# EAGLE board Ampli-2020 (EAGLE 7.2.0)
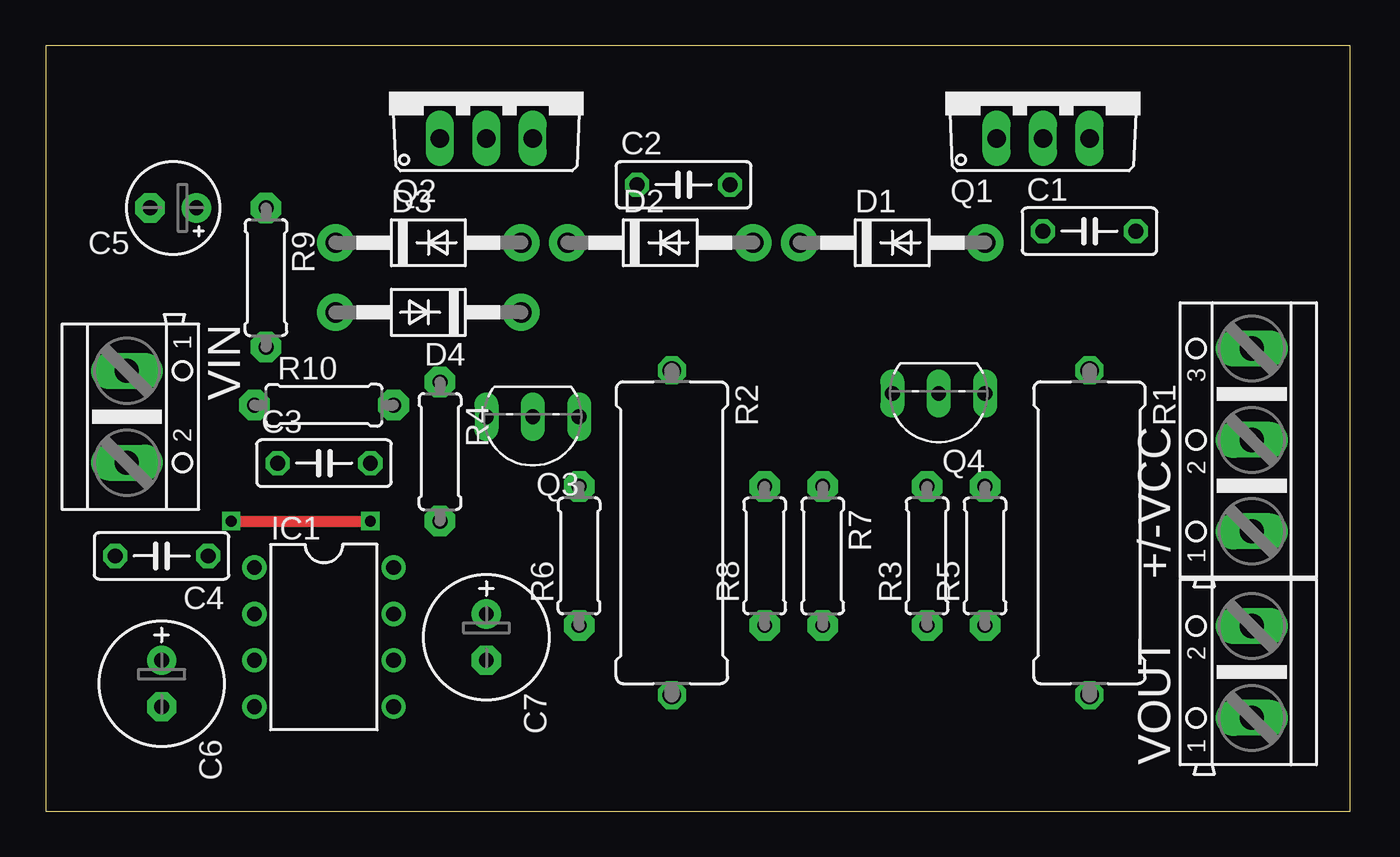
[diagram p0: board, top side]
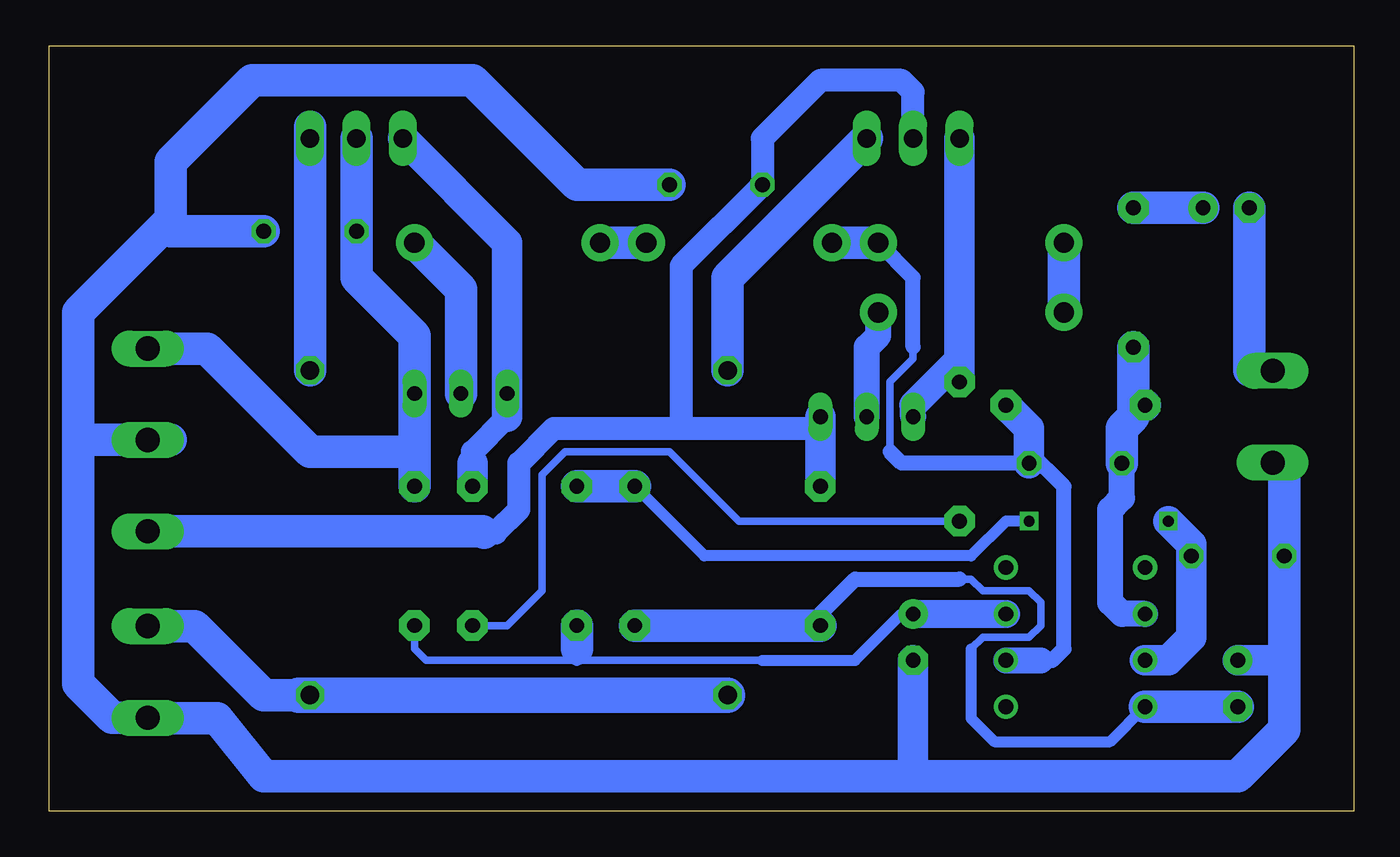
[diagram p1: board, bottom side, seen from below]

Size 71.42 x 41.9 mm. Coordinates in mm from the lower left corner, seen from the top.
Outline: 0,0 71.42,0 71.42,41.9 0,41.9 0,0
Copper layers (1*16): Top 0.035mm / dielectric 1.5mm / Bottom 0.035mm
Design rules "default": minimum track width 10mil, minimum drill 24mil, track to track 8mil, track to pad 8mil, pad to pad 8mil, via to via 8mil, smd to smd 8mil, copper to edge 40mil, drill to drill 8mil, minimum pad ring 10mil, minimum via ring 8mil, stop-mask expansion 4mil, vias tented up to drill 0mil, thermal gap 10mil

## Footprints (pad centres in the part's own frame; a part is rotated, then mirrored left to right if it is on the bottom)
AK500/3 = drill 1.321 long: 1 -5.004,0; 2 0,0; 3 5.004,0
C050-025X075 = drill 0.813 octagon: 1 -2.54,0; 2 2.54,0
E2,5-5 = drill 0.813 pad 1.6: + -1.27,0 | drill 0.813 pad 1.6 octagon: - 1.27,0
E2,5-7 = drill 0.813 pad 1.6: + -1.27,0 | drill 0.813 pad 1.6 octagon: - 1.27,0
DO41-10 = drill 1.118 pad 2.032: A 5.08,0; C -5.08,0
DIL08 = drill 0.813 pad 1.27: 1 -3.81,-3.81; 2 -1.27,-3.81; 3 1.27,-3.81; 4 3.81,-3.81; 5 3.81,3.81; 6 1.27,3.81; 7 -1.27,3.81; 8 -3.81,3.81
TO220AV = drill 1.016 long: B -2.54,-2.54; C 0,-2.54; E 2.54,-2.54
TO92-EBC = drill 0.813 long: B 0,-1.27; C -2.54,-1.27; E 2.54,-1.27
0617/17 = drill 1.016 octagon: 1 -8.89,0; 2 8.89,0
0207/7 = drill 0.813 pad 1.676 octagon: 1 -3.81,0; 2 3.81,0
AK500/2 = drill 1.321 long: 1 -2.515,0; 2 2.515,0

## Placement (x,y rotation side)
+/-VCC  [AK500/3]  66.04,20.32 90 top
C1  [C050-025X075]  57.15,31.75 0 top
C2  [C050-025X075]  34.93,34.29 0 top
C3  [C050-025X075]  15.24,19.05 0 top
C4  [C050-025X075]  6.35,13.97 180 top
C5  [E2,5-5]  6.98,33.02 180 top
C6  [E2,5-7]  6.35,6.98 270 top
C7  [E2,5-7]  24.13,9.52 270 top
D1  1N4004  [DO41-10]  46.36,31.11 0 top
D2  1N4004  [DO41-10]  33.66,31.11 0 top
D3  1N4004  [DO41-10]  20.95,31.11 0 top
D4  1N4004  [DO41-10]  20.95,27.3 180 top
IC1  TL071P  [DIL08]  15.24,9.52 270 top
Q1  TIP41C  [TO220AV]  54.61,39.37 0 top
Q2  TIP42C  [TO220AV]  24.13,39.37 0 top
Q3  BC560  [TO92-EBC]  26.67,20.32 180 top
Q4  BC550C  [TO92-EBC]  48.9,21.59 180 top
R1  [0617/17]  57.15,15.24 270 top
R2  [0617/17]  34.29,15.24 270 top
R3  [0207/7]  48.26,13.97 90 top
R4  [0207/7]  21.59,19.68 270 top
R5  [0207/7]  51.44,13.97 90 top
R6  [0207/7]  29.21,13.97 90 top
R7  [0207/7]  42.55,13.97 270 top
R8  [0207/7]  39.37,13.97 90 top
R9  [0207/7]  12.06,29.21 270 top
R10  [0207/7]  15.24,22.22 0 top
VIN  [AK500/2]  4.44,21.59 270 top
VOUT  [AK500/2]  66.04,7.62 90 top

## Library data of the parts
+/-VCC VIN VOUT = con-ptr500; OC_FARNELL: unknown; OC_NEWARK: unknown
C1-C7 R1-R10 = rcl
D1-D4 = diode
IC1 = linear
Q1 Q2 = transistor-power
Q3 = transistor-pnp
Q4 = transistor-npn

## Nets
GND: +/-VCC.2 C1.2 C2.2 C4.2 C6.+ C7.- VIN.2 VOUT.1
N$1: Q2.B Q3.E R4.1
N$2: D1.C D2.A
N$3: C3.2 D2.C D3.A IC1.6 R10.2
N$4: D3.C D4.A
N$5: D1.A Q4.B
N$6: Q1.B Q4.E R3.2
N$7: R3.1 R4.2
N$8: D4.C Q3.B
N$9: Q2.E R2.1
N$10: Q1.E R1.1
N$11: R1.2 R2.2 VOUT.2
N$12: C5.+ R9.1
N$13: +/-VCC.1 C2.1 Q2.C Q3.C R6.2
N$14: C5.- VIN.1
N$16: +/-VCC.3 C1.1 Q1.C Q4.C R5.2
N$17: C7.+ IC1.7 R5.1 R7.2
N$19: C3.1 IC1.2 R9.2 R10.1
N$24: C4.1 IC1.3 R7.1 R8.2
V2: C6.- IC1.4 R6.1 R8.1

## Tracks (layer width: path | path; a pad name or v marks a point on that pad's centre or on a via)
GND
  Bottom 1.676: C6.+ 3.81,8.25 | C7.- 24.13,1.9
  Bottom 1.778: 69.85,20.32 69.85,6.98 67.97,5.11 VOUT.1 66.02,5.08 62.23,5.08 59.69,1.9 24.13,1.9 6.35,1.9 3.81,4.45 3.81,8.25 C4.2 3.81,19.07 VIN.2 | 69.85,20.32 69.85,27.3 65.09,32.07 | 65.09,32.07 64.77,32.39 64.77,35.56 60.33,40 48.26,40 42.55,34.29 C2.2 | C1.2 64.77,31.75 65.09,32.07 | 64.77,20.32 +/-VCC.2 69.85,20.32
N$1
  Bottom 1.422: Q3.E 24.13,22.22
  Bottom 1.524: 24.13,22.22 21.59,24.76
  Bottom 1.676: R4.1 21.59,24.76 Q2.B
N$2
  Bottom 1.778: D2.A D1.C
N$3
  Bottom 0.406: 25.4,19.68 25.4,23.5 24.13,24.76 24.13,25.4
  Bottom 0.813: 17.14,8.25 16.51,8.25 15.87,8.89 15.87,17.78 17.78,19.68 | 17.78,20.96 C3.2 24.77,19.05 25.4,19.68 | 24.13,25.4 24.13,29.21 D3.A
  Bottom 1.422: IC1.6 17.14,8.25
  Bottom 1.676: R10.2 17.78,20.96 17.78,19.68 C3.2
  Bottom 1.778: D2.C D3.A
N$4
  Bottom 1.778: D3.C D4.A
N$5
  Bottom 1.778: Q4.B 48.9,28.57 D1.A
N$6
  Bottom 1.27: 48.26,19.05 48.26,19.68 46.36,21.59
  Bottom 1.676: Q1.B 46.36,31.11 46.36,23.5 Q4.E 46.36,21.59 | R3.2 48.26,19.05
N$7
  Bottom 0.406: R3.1 46.36,10.16 44.45,12.06 44.45,18.42 43.18,19.68 37.47,19.68 33.66,15.87 22.23,15.87 21.59,16.51 R4.2
N$8
  Bottom 1.422: Q3.B 26.67,25.4 26.04,26.04 D4.C
N$9
  Bottom 1.778: R2.1 34.29,29.21 Q2.E
N$10
  Bottom 1.778: R1.1 Q1.E 57.15,37.47
N$11
  Bottom 1.778: VOUT.2 63.47,10.13 59.69,6.35 R1.2
  Bottom 1.93: R2.2 R1.2 57.78,6.35
N$12
  Bottom 1.778: C5.+ R9.1
N$13
  Bottom 1.27: Q2.C 24.13,39.37 24.77,40 29.21,40 32.38,36.83 C2.1 36.83,29.85 36.83,20.96 | 47.62,15.24 46.99,15.24 45.72,16.51 45.72,19.05 43.81,20.96 36.83,20.96 | 36.83,20.96 29.21,20.96
  Bottom 1.676: R6.2 29.21,20.96 Q3.C
  Bottom 1.778: +/-VCC.1 47.7,15.32 47.62,15.24
N$14
  Bottom 1.778: C5.- 5.71,24.13 4.47,24.13 VIN.1
N$16
  Bottom 1.778: 51.44,19.68 57.15,19.68 62.79,25.32 +/-VCC.3 | 51.44,19.68 R5.2 | 51.44,19.68 Q4.C 51.44,26.04 54.61,29.21 C1.1 Q1.C
N$17
  Bottom 0.406: R5.1 51.44,8.89 50.8,8.25 42.55,8.25 32.38,8.25
  Bottom 0.61: 42.55,8.89 42.55,8.25 | 32.38,8.25 27.3,8.25 24.77,10.79 C7.+
  Bottom 1.524: C7.+ IC1.7
  Bottom 1.778: R7.2 42.55,8.89
N$19
  Bottom 1.422: IC1.2 12.7,10.79 13.33,11.43 13.33,16.51 12.7,17.14 C3.1
  Bottom 1.778: R9.2 12.06,22.22 | 12.06,22.22 12.06,21.59 12.7,20.96 C3.1 | R10.1 12.06,22.22
N$24  (via drill 0.6)
  Top 0.61: v10.16,15.87 v17.78,15.87
  Bottom 0.61: v17.78,15.87 19.05,15.87 20.95,13.97 35.56,13.97 R8.2
  Bottom 1.676: IC1.3 10.16,8.25 8.89,9.52 C4.1 8.89,14.61 v10.16,15.87
  Bottom 1.778: R7.1 R8.2
S$1  (via drill 0.6)
  other vias: 17.78,15.87
V2
  Bottom 0.406: 21.59,12.7 20.95,12.7 20.32,12.06 17.78,12.06 17.14,11.43 17.14,10.16 17.78,9.52 20.32,9.52 20.95,8.89
  Bottom 0.61: 20.95,8.89 20.95,5.08 19.69,3.81 13.33,3.81 IC1.4
  Bottom 0.813: R6.1 29.21,10.79 27.3,12.7 21.59,12.7
  Bottom 1.778: R8.1 R6.1 | IC1.4 C6.-